# EAGLE board hexapod_mk2_main_v2.0 (EAGLE 9.6.2)
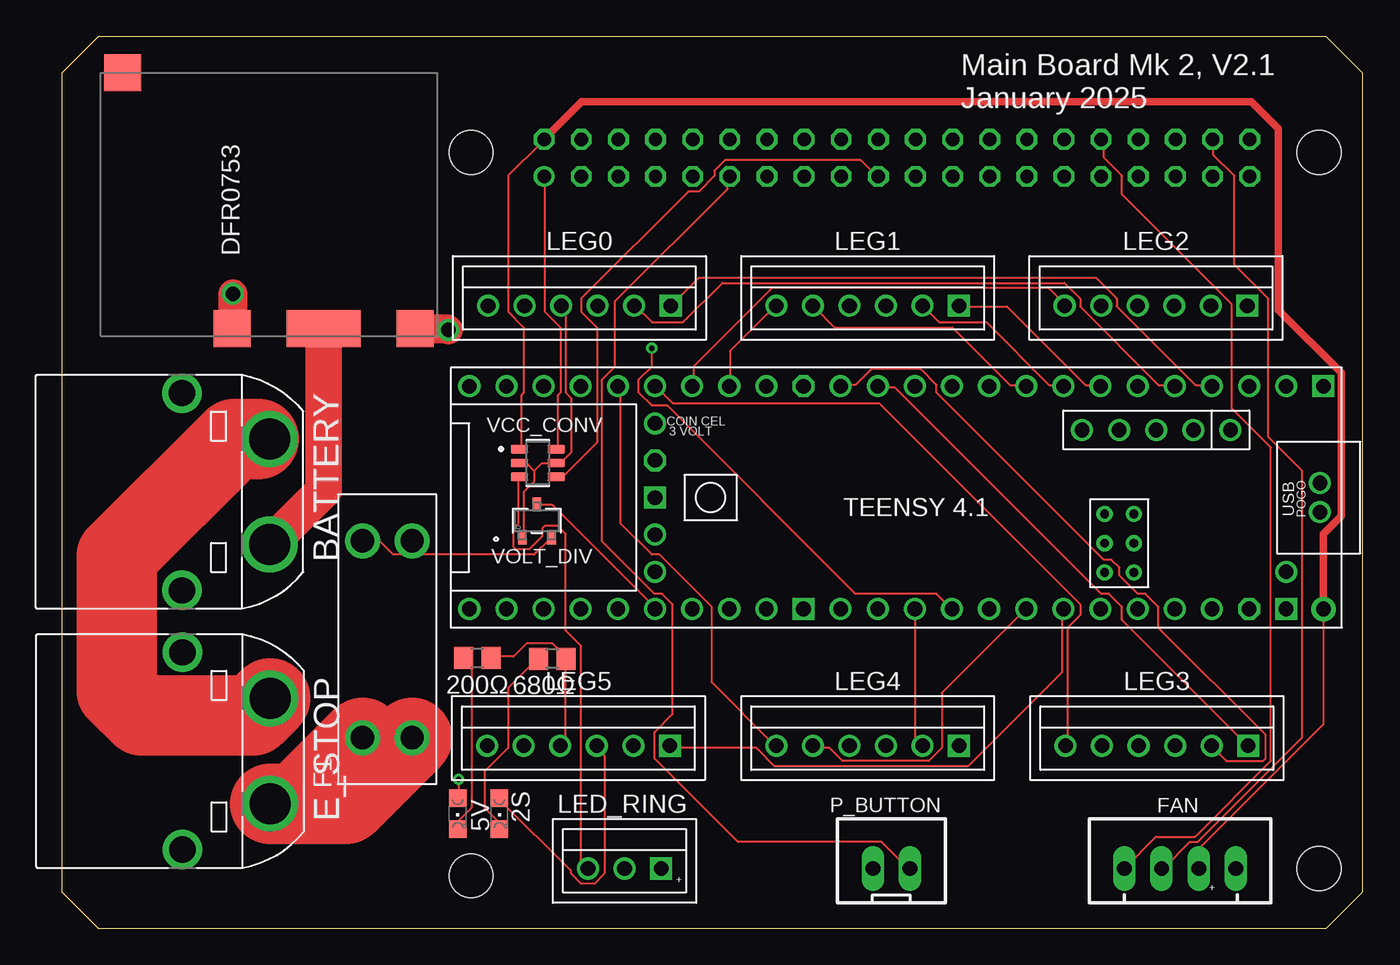
[diagram p0: board, top side]
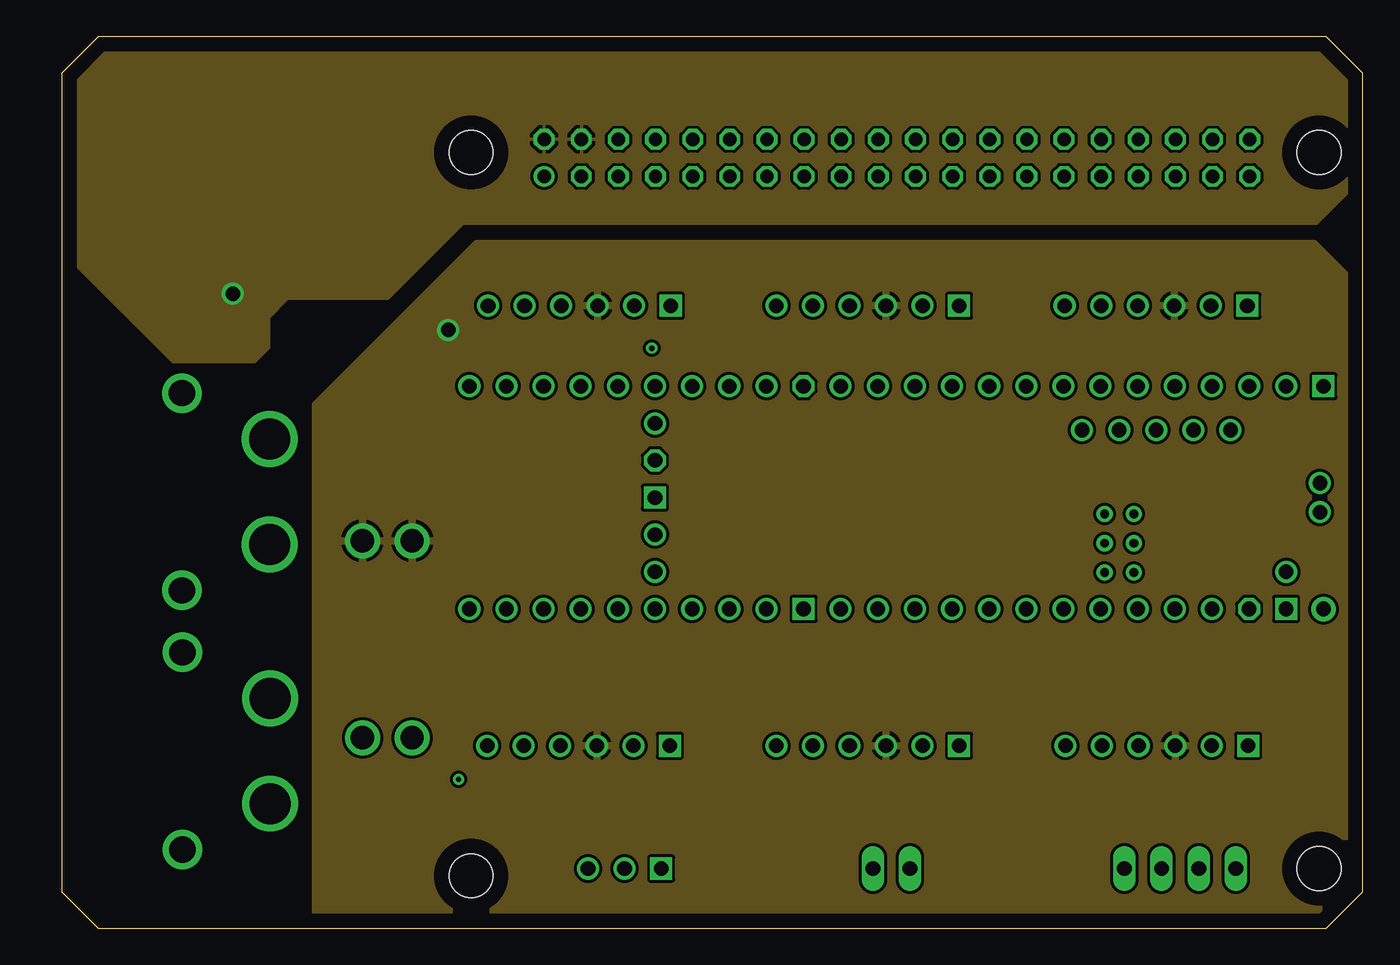
[diagram p1: board, inner layer Route2]
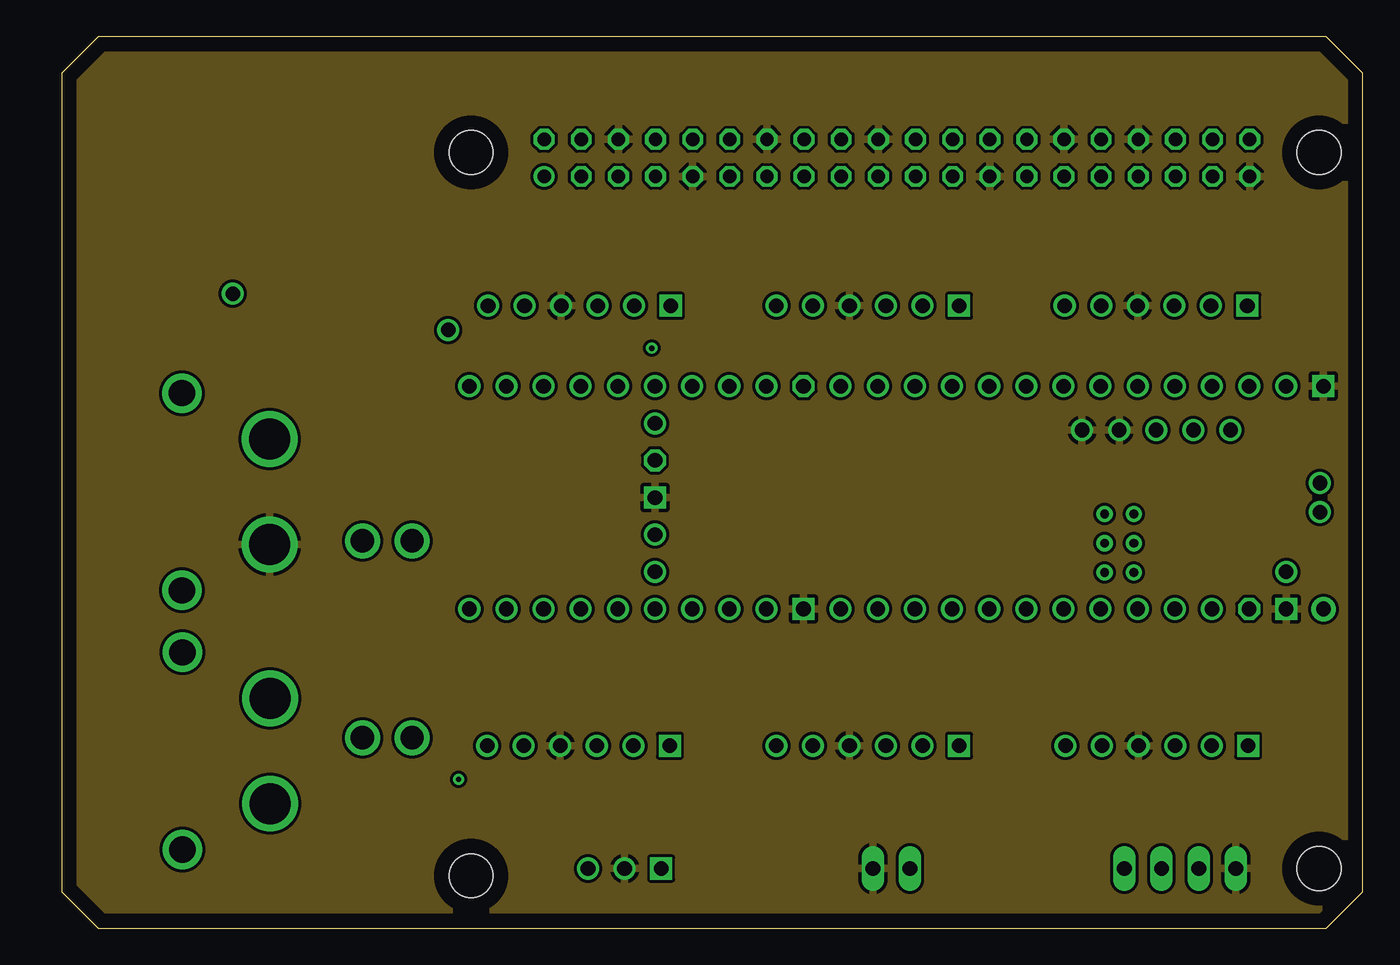
[diagram p2: board, inner layer Route15]
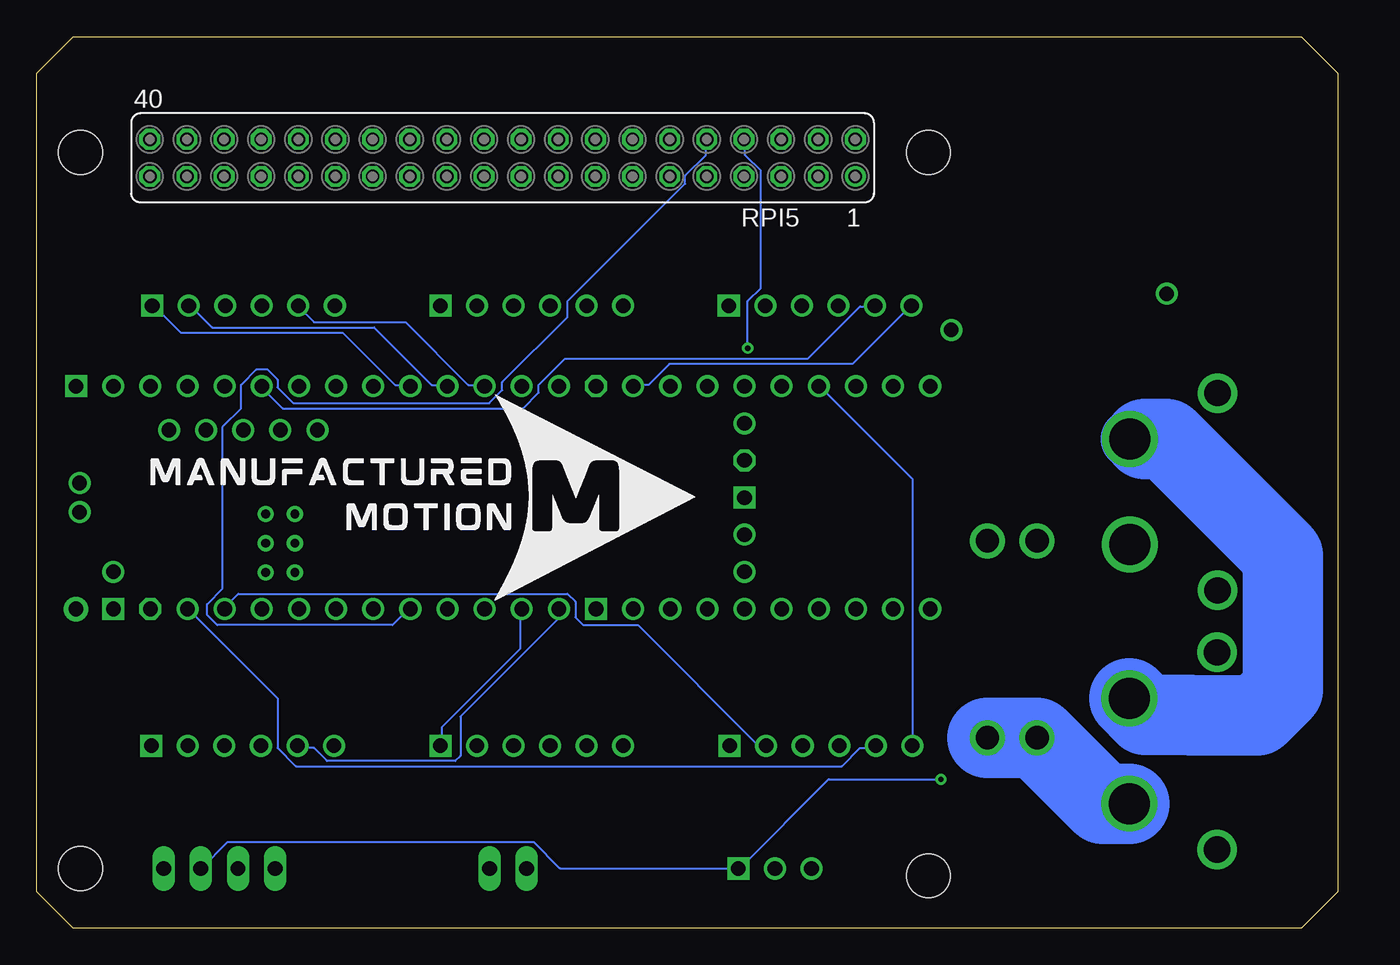
[diagram p3: board, bottom side, seen from below]

Size 89 x 61 mm. Coordinates in mm from the lower left corner, seen from the top.
Outline: 0,58.5 0,2.5 2.5,0 86.5,0 89,2.5 89,58.5 86.5,61 2.5,61 0,58.5
Copper layers (1+2*15+16): Top 0.035mm / dielectric 1.5mm / Route2 0.035mm / dielectric 0.15mm / Route15 0.035mm / dielectric 0.2mm / Bottom 0.035mm
Design rules "default *": minimum track width 6mil, minimum drill 0.35mm, track to track 6mil, track to pad 6mil, pad to pad 6mil, via to via 6mil, smd to smd 6mil, copper to edge 40mil, drill to drill 6mil, minimum pad ring 10mil, minimum via ring 8mil, stop-mask expansion 4mil, vias tented up to drill 0mil, thermal gap 10mil
Net classes: 0 default: clearance 0.205 mm
Holes 3 mm at 27.99,53.08 27.99,3.58 85.99,53.08 85.99,4.08

## Footprints (pad centres in the part's own frame; a part is rotated, then mirrored left to right if it is on the bottom)
CHIPLED_0805 = smd 1.2 x 1.2: A 0,-1.05; C 0,1.05
R0805 = smd 1.3 x 1.5: 1 -0.95,0; 2 0.95,0
XT60PW-M = drill 2.8: + 3.6,0; - -3.6,0 | drill 1.8: P$3 -6.75,6; P$4 6.75,6
DFR0753 = smd 2.54 x 2.54: ANCHOR 9,10; VIN -8.5,-10; VOUT -8.5,2.5 | smd 2.54 x 5.08: GND -8.5,-3.75
FUSE_3557-2 = drill 1.6: 1_1 -6.735,1.7; 1_2 -6.735,-1.7; 2_1 6.735,1.7; 2_2 6.735,-1.7
JST-XH-04-PACKAGE-LONG-PAD = drill 1.016 long: 1 -3.81,0; 2 -1.27,0; 3 1.27,0; 4 3.81,0
B3B-XH = drill 1 square: P$1 2.5,0 | drill 1: P$2 0,0; P$3 -2.5,0
B6B-XH = drill 1 square: P$1 6.25,0 | drill 1: P$2 3.75,0; P$3 1.25,0; P$4 -1.25,0; P$5 -3.75,0; P$6 -6.25,0
JST-XH-02-PACKAGE-LONG-PAD = drill 1.016 long: 1 -1.27,0; 2 1.27,0
MPM_VIS = smd 0.584 x 0.965: 1 -1.003,-1.118; 2 1.003,-1.118; 3 0,1.118
FE20-2 = drill 0.914: 1 -24.13,1.27 | drill 0.914 octagon: 2 -24.13,-1.27; 3 -21.59,1.27; 4 -21.59,-1.27; 5 -19.05,1.27; 6 -19.05,-1.27; 7 -16.51,1.27; 8 -16.51,-1.27; 9 -13.97,1.27; 10 -13.97,-1.27; 11 -11.43,1.27; 12 -11.43,-1.27; 13 -8.89,1.27; 14 -8.89,-1.27; 15 -6.35,1.27; 16 -6.35,-1.27; 17 -3.81,1.27; 18 -3.81,-1.27; 19 -1.27,1.27; 20 -1.27,-1.27; 21 1.27,1.27; 22 1.27,-1.27; 23 3.81,1.27; 24 3.81,-1.27; 25 6.35,1.27; 26 6.35,-1.27; 27 8.89,1.27; 28 8.89,-1.27; 29 11.43,1.27; 30 11.43,-1.27; 31 13.97,1.27; 32 13.97,-1.27; 33 16.51,1.27; 34 16.51,-1.27; 35 19.05,1.27; 36 19.05,-1.27; 37 21.59,1.27; 38 21.59,-1.27; 39 24.13,1.27; 40 24.13,-1.27
SOT95P280X145-6N = smd 1.21 x 0.58: 1 -1.255,0.95; 2 -1.255,0; 3 -1.255,-0.95; 4 1.255,-0.95; 5 1.255,0; 6 1.255,0.95
TEENSY41 = drill 1: 0-RX1/CS1/CRX2 -27.94,-7.62; 1-TX1/MISO1/CTX2 -25.4,-7.62; 2-OUT2 -22.86,-7.62; 3-LRCLK2 -20.32,-7.62; 4-BCLK2 -17.78,-7.62; 5-IN2 -15.24,-7.62; 6-OUT1D -12.7,-7.62; 7-RX2/OUT1A -10.16,-7.62; 8-TX2/IN2 -7.62,-7.62; 9-OUT1C -5.08,-7.62; 10-CS\MQSR -2.54,-7.62; 11-MOSI/CTX1 0,-7.62; 12-MISO/MQSL 2.54,-7.62; 13-SCK/LED 2.54,7.62; 14-A0/TX3/SPDIF_OUT 0,7.62; 15-A1/RX3/SPDIF_IN -2.54,7.62; 16-A2/RX4/SCL1 -5.08,7.62; 17-A3/TX4/SDA1 -7.62,7.62; 18-A4/SDA0 -10.16,7.62; 19-A5/SCL0 -12.7,7.62; 20-A6/TX5/LRCLK1 -15.24,7.62; 21-A7/RX5/BCLK1 -17.78,7.62; 22-A8/CTX1 -20.32,7.62; 23-A9/CRX1/MCLK1 -22.86,7.62; 24-A10/TX6/SCL2 7.62,-7.62; 25-A11/RX6/SDA2 10.16,-7.62; 26-A12/MOSI1 12.7,-7.62; 27-A13/SCK1 15.24,-7.62; 28-RX7 17.78,-7.62; 29-TX7 20.32,-7.62; 30-CRX3 22.86,-7.62; 31-CTX3 25.4,-7.62; 32-OUT1B 27.94,-7.62; 33-MCLK2 27.94,7.62; 34-RX8 25.4,7.62; 35-TX8 22.86,7.62; 36-PWM 20.32,7.62; 37-PWM 17.78,7.62; 38-A14/CS/IN1 15.24,7.62; 39-A15/CS/OUT1A 12.7,7.62; 40-A16/CS1 10.16,7.62; 41-A17/MISO1 7.62,7.62; +5V -24.13,-4.62; D+ -30.25,-1; D- -30.25,1; DM -21.59,-4.62; DP -19.05,-4.62; GND4 -16.51,-4.62; GND5 -13.97,-4.62; ON/OFF 15.24,5.08; PROGRAM 15.24,2.54; VBAT 15.24,-5.08; VUSB -27.94,5.08 | drill 1 octagon: 3V3-1 5.08,-7.62; 3V3-2 15.24,-2.54; 3V3-3 -25.4,7.62 | drill 0.6: G -15.51,3.12; LED -17.51,3.12; R+ -17.51,5.12; R- -15.51,5.12; T+ -15.51,1.12; T- -17.51,1.12 | drill 1 square: GND1 -30.48,-7.62; GND2 15.24,0; GND3 5.08,7.62; GND6 -27.94,7.62 | drill 1 pad 1.676: VIN -30.48,7.62

## Placement (x,y rotation side)
2S  [CHIPLED_0805]  29.93,7.84 180 top
5V  [CHIPLED_0805]  27.08,7.84 180 top
200Ω  [R0805]  28.42,18.48 180 top
680Ω  [R0805]  33.54,18.43 180 top
BATTERY  XT60PW-M  [XT60PW-M]  14.21,29.86 90 top
DFR0753  DFR0753  [DFR0753]  14.16,49.52 90 top
E_STOP  XT60PW-M  [XT60PW-M]  14.25,12.12 90 top
F1  3557-2  [FUSE_3557-2]  22.26,19.76 90 top
FAN  JST-XH-04-PIN-LONG-PAD  [JST-XH-04-PACKAGE-LONG-PAD]  76.49,4.08 0 top
LED_RING  03-JST-B3B-XH-A  [B3B-XH]  38.49,4.08 0 top
LEG0  06-JST-B6B-XH-A  [B6B-XH]  35.4,42.59 0 top
LEG1  06-JST-B6B-XH-A  [B6B-XH]  55.12,42.59 0 top
LEG2  06-JST-B6B-XH-A  [B6B-XH]  74.84,42.59 0 top
LEG3  06-JST-B6B-XH-A  [B6B-XH]  74.9,12.48 0 top
LEG4  06-JST-B6B-XH-A  [B6B-XH]  55.12,12.48 0 top
LEG5  06-JST-B6B-XH-A  [B6B-XH]  35.34,12.48 0 top
P_BUTTON  JST-XH-02-PIN-LONG-PAD  [JST-XH-02-PACKAGE-LONG-PAD]  56.74,4.08 0 top
R1  MPMT10014001AT1MPM_VIS  [MPM_VIS]  32.49,27.86 0 top
RPI5  Raspberry Pi  [FE20-2]  57.12,52.7 180 bottom
U2  SN74LVC1T45DBVR  [SOT95P280X145-6N]  32.55,31.82 0 top
U$1  TEENSY41  [TEENSY41]  55.81,29.46 180 top

## Library data of the parts
2S 5V = led
200Ω 680Ω = rcl; SPICEPREFIX: R
BATTERY E_STOP = amass
DFR0753 = DFR0753
F1 = 3557-2; MANUFACTURER: Keystone; MAXIMUM_PACKAGE_HEIGHT: 7.37mm; PARTREV: D; SNAPEDA_PN: 3557-2; STANDARD: Manufacturer Recommendation
FAN P_BUTTON = Rembrandt Electronics - JST XH Connectors v1-0
LED_RING LEG0 LEG1-LEG5 = bt_con-jst-xh
R1 = MPMT10014001AT1; COPYRIGHT: Copyright (C) 2024 Ultra Librarian. All rights reserved.; MANUFACTURER_PART_NUMBER: MPMT10014001AT1; MFR_NAME: Vishay
RPI5 = con-lsta; OC_FARNELL: unknown; OC_NEWARK: unknown
U2 = SN74LVC1T45DBVR
U$1 = teensy

## Nets
2S_BAT: BATTERY.+ E_STOP.+
2S_ESTOP: E_STOP.- F1.1_1 F1.1_2
2S_PROT: 2S.A DFR0753.VIN F1.2_1 F1.2_2 LEG0.P$3 LEG1.P$3 LEG2.P$3 LEG3.P$3 LEG4.P$3 LEG5.P$3 R1.2
3.3V: RPI5.1 U2.6
5V: 5V.A DFR0753.VOUT FAN.3 LED_RING.P$1 RPI5.2 RPI5.4 U2.1 U$1.VIN
FAN_PWM: FAN.1 RPI5.32
FAN_RPM: FAN.2 RPI5.38
GND: 200Ω.1 680Ω.1 BATTERY.- DFR0753.GND FAN.4 LED_RING.P$2 LEG0.P$4 LEG1.P$4 LEG2.P$4 LEG3.P$4 LEG4.P$4 LEG5.P$4 P_BUTTON.1 R1.1 RPI5.6 RPI5.9 RPI5.14 RPI5.20 RPI5.25 RPI5.30 RPI5.34 RPI5.39 U2.2 U2.5 U$1.GND1 U$1.GND2 U$1.GND3 U$1.GND4 U$1.GND5 U$1.GND6
L0M1: LEG0.P$1 U$1.2-OUT2
L0M2: LEG0.P$2 U$1.3-LRCLK2
L0M3: LEG0.P$5 U$1.4-BCLK2
L0SIG: LEG0.P$6 U$1.24-A10/TX6/SCL2
L1M1: LEG1.P$1 U$1.5-IN2
L1M2: LEG1.P$2 U$1.6-OUT1D
L1M3: LEG1.P$5 U$1.7-RX2/OUT1A
L1SIG: LEG1.P$6 U$1.25-A11/RX6/SDA2
L2M1: LEG2.P$1 U$1.8-TX2/IN2
L2M2: LEG2.P$2 U$1.9-OUT1C
L2M3: LEG2.P$5 U$1.10-CS\MQSR
L2SIG: LEG2.P$6 U$1.26-A12/MOSI1
L3M1: LEG3.P$1 U$1.11-MOSI/CTX1
L3M2: LEG3.P$2 U$1.12-MISO/MQSL
L3M3: LEG3.P$5 U$1.13-SCK/LED
L3SIG: LEG3.P$6 U$1.27-A13/SCK1
L4M1: LEG4.P$1 U$1.14-A0/TX3/SPDIF_OUT
L4M2: LEG4.P$2 U$1.15-A1/RX3/SPDIF_IN
L4M3: LEG4.P$5 U$1.18-A4/SDA0
L4SIG: LEG4.P$6 U$1.28-RX7
L5M1: LEG5.P$1 U$1.19-A5/SCL0
L5M2: LEG5.P$2 U$1.22-A8/CTX1
L5M3: LEG5.P$5 U$1.23-A9/CRX1/MCLK1
L5SIG: LEG5.P$6 U$1.29-TX7
LEDSIG: RPI5.19 U2.4
LEDSIG_CONV: LED_RING.P$3 U2.3
N$1: 5V.C 200Ω.2
N$2: 2S.C 680Ω.2
PWRSIG: P_BUTTON.2 RPI5.11
RPI_RX: RPI5.10 U$1.17-A3/TX4/SDA1
RPI_TX: RPI5.8 U$1.16-A2/RX4/SCL1
V_DIV: R1.3 U$1.38-A14/CS/IN1

## Tracks (layer width: path | path; a pad name or v marks a point on that pad's centre or on a via)
2S_BAT
  Top 0.152: 13.43,33.44 11.79,33.44 11.77,33.46
  Top 4: BATTERY.+ 13.45,33.46 13.43,33.44
  Top 5.5: 13.45,33.46 11.77,33.46 3.77,25.45 3.77,16.24 5.45,14.56 13.1,14.56 E_STOP.+
  Bottom 4: BATTERY.+ 13.18,33.46
  Bottom 5.5: 13.18,33.46 11.72,33.46 3.77,25.5 3.77,16.29 5.49,14.56 10.04,14.56 10.07,14.6 13.14,14.6 E_STOP.+
2S_ESTOP
  Top 5.5: F1.1_1 16.05,8.52 E_STOP.- 19.45,8.52 F1.1_2
  Bottom 5.5: E_STOP.- 16.05,8.52 F1.1_1 F1.1_2
2S_PROT  (via drill 1)
  Top 0.152: R1.2 33.38,26.63 32.31,25.55 22.66,25.55 21.72,26.5 F1.2_1 | 2S.A 29.99,8.76 34.81,3.93 34.81,3.75 35.53,3.04 36.42,3.04 37.13,3.75 37.13,11.79 36.6,12.33 LEG5.P$3
  Top 2: DFR0753.VIN 26.34,41.02 v26.43,40.92
  pour Route2: 28.37,46.84 85.67,46.84 88.82,43.69 88.82,1.05 87.5,-0.26 17.34,-0.26 17.34,35.81
3.3V
  Top 0.152: U2.6 33.92,32.88 33.92,36.45 34.1,36.63 34.1,41.1 33.02,42.17 33.02,51.29 RPI5.1
5V  (via drill 0.35, 1)
  Top 0.152: v27.13,10.19 27.13,8.94 5V.A | U2.1 31.42,32.88 31.42,36.45 31.6,36.63 31.6,41.1 30.52,42.17 30.52,51.47 32.85,53.79 RPI5.2 | FAN.3 77.88,4.11 77.88,5.54 86.28,13.94 86.28,21.62 U$1.VIN
  Top 0.5: RPI5.2 35.56,56.54 81.37,56.54 83.22,54.68 83.22,42.3 87.5,38.02 87.5,28.19 86.29,26.98 U$1.VIN
  Top 2: DFR0753.VOUT 11.69,41.05 v11.69,43.41
  Bottom 0.152: v27.13,10.19 34.81,10.19 40.89,4.11 LED_RING.P$1 41.07,4.11 53.22,4.11 55.01,5.9 75.91,5.9 77.7,4.11 FAN.3
  pour Route2: 0.63,60.94 86.41,60.94 89.26,58.1 89.26,51.58 85.84,48.16 27.45,48.16 27.09,47.81 22.31,43.03 15.46,43.03 14.2,41.77 14.2,39.72 13.17,38.69 7.58,38.69 0.59,45.68 0.59,60.93 0.61,60.93
FAN_PWM
  Top 0.152: RPI5.32 71.27,53.97 71.27,52.72 72.52,51.47 72.52,50.22 80.02,42.71 80.02,35.56 82.7,32.88 82.7,11.44 77.52,6.25 74.84,6.25 72.7,4.11 FAN.1
FAN_RPM
  Top 0.152: RPI5.38 78.77,53.97 78.77,52.9 80.2,51.47 80.2,45.39 82.53,43.07 82.53,33.6 84.85,31.27 84.85,13.04 77.7,5.9 77.16,5.9 75.38,4.11 FAN.2
GND
  Top 0.152: 32.31,31.27 32.31,30.56 31.6,29.84 31.6,26.8 R1.1 | 32.31,31.27 31.77,31.81 31.42,31.81 U2.2 | 32.31,31.27 32.85,31.81 33.74,31.81 U2.5 33.92,31.99 34.28,31.99 34.81,32.52 34.81,36.28 34.45,36.63 34.45,42.35 34.28,42.53 LEG0.P$4 | 200Ω.1 29.45,18.59 30.88,18.59 31.77,19.48 33.56,19.48 34.45,18.59 680Ω.1 34.45,18.41 34.45,12.87 34.1,12.51 LEG5.P$4
  Top 2.5: BATTERY.- 17.91,29.95 DFR0753.GND
  pour Route15: 84.45,65.05 92.5,57.01 92.5,1.13 88.35,-3.02 87.97,-3.39 -14.21,-3.39 -6.65,65.06 -6.65,65.04 -6.64,65.05
L0M1
  Top 0.152: U$1.2-OUT2 78.59,37.17 77.52,37.17 72.16,42.53 72.16,43.07 70.73,44.5 43.57,44.5 41.78,42.71 LEG0.P$1
L0M2
  Top 0.152: U$1.3-LRCLK2 76.09,37.17 75.02,37.17 69.66,42.53 69.66,43.07 68.59,44.14 45.18,44.14 42.5,41.46 40.35,41.46 39.28,42.53 LEG0.P$2
L0M3
  Bottom 0.152: LEG0.P$5 31.77,42.53 32.67,42.53 36.24,38.96 52.86,38.96 54.65,37.17 54.65,36.63 55.72,35.56 72.16,35.56 73.59,36.99 U$1.4-BCLK2
L0SIG
  Bottom 0.152: U$1.24-A10/TX6/SCL2 48.04,37.17 47.14,37.17 45.71,38.6 33.2,38.6 29.27,42.53 LEG0.P$6
L1M1
  Top 0.152: U$1.5-IN2 70.91,37.17 70.02,37.17 64.66,42.53 61.44,42.53 LEG1.P$1
L1M2
  Top 0.152: U$1.6-OUT1D 68.41,37.17 67.51,37.17 63.22,41.46 60.01,41.46 58.94,42.53 LEG1.P$2
L1M3
  Top 0.152: U$1.7-RX2/OUT1A 65.91,37.17 64.83,37.17 60.9,41.1 52.86,41.1 51.43,42.53 LEG1.P$5
L1SIG
  Top 0.152: U$1.25-A11/RX6/SDA2 45.71,37.17 45.71,39.49 48.75,42.53 LEG1.P$6
L2M1
  Bottom 0.152: U$1.8-TX2/IN2 63.58,37.17 64.48,37.17 68.05,40.74 79.13,40.74 80.92,42.53 LEG2.P$1
L2M2
  Bottom 0.152: U$1.9-OUT1C 60.9,37.17 61.98,37.17 65.91,41.1 76.98,41.1 78.42,42.53 LEG2.P$2
L2M3
  Bottom 0.152: U$1.10-CS\MQSR 58.4,37.17 59.47,37.17 63.76,41.46 70.02,41.46 71.09,42.53 LEG2.P$5
L2SIG
  Top 0.152: U$1.26-A12/MOSI1 43.21,37.17 43.21,38.42 48.57,43.78 67.51,43.78 68.59,42.71 LEG2.P$6
L3M1
  Top 0.152: U$1.11-MOSI/CTX1 55.9,36.99 56.97,36.99 71.09,22.87 71.62,22.87 72.52,21.98 72.52,21.09 81.1,12.51 LEG3.P$1
L3M2
  Top 0.152: U$1.12-MISO/MQSL 53.4,37.17 54.29,37.17 55.36,38.24 58.76,38.24 59.83,37.17 59.83,36.63 71.27,25.2 71.8,25.2 72.34,24.66 72.34,24.12 73.59,22.87 74.13,22.87 75.02,21.98 75.02,20.55 82.35,13.22 82.35,11.62 82.17,11.44 79.67,11.44 78.77,12.33 LEG3.P$2
L3M3
  Bottom 0.152: LEG3.P$5 71.09,12.33 70.02,12.33 69.12,11.44 60.37,11.44 60.01,11.79 60.01,14.47 53.4,21.09 53.4,21.8 U$1.13-SCK/LED
L3SIG
  Top 0.152: LEG3.P$6 68.77,12.51 68.77,20.55 69.66,21.44 69.66,22.16 55.9,35.92 41.78,35.92 40.71,36.99 U$1.27-A13/SCK1
L4M1
  Bottom 0.152: U$1.14-A0/TX3/SPDIF_OUT 55.9,21.8 55.9,19.12 61.26,13.76 61.26,12.51 LEG4.P$1
L4M2
  Top 0.152: U$1.15-A1/RX3/SPDIF_IN 58.4,21.8 58.4,12.87 58.76,12.51 LEG4.P$2
L4M3
  Top 0.152: LEG4.P$5 51.43,12.33 52.5,12.33 53.4,11.44 59.29,11.44 60.19,12.33 60.19,16.08 65.91,21.8 U$1.18-A4/SDA0
L4SIG
  Top 0.152: U$1.28-RX7 38.21,36.99 38.21,27.7 40.35,25.55 40.89,25.55 44.46,21.98 44.46,16.8 48.75,12.51 LEG4.P$6
L5M1
  Top 0.152: LEG5.P$1 41.6,12.33 47.5,12.33 48.75,11.08 61.98,11.08 68.41,17.51 68.41,21.8 U$1.19-A5/SCL0
L5M2
  Bottom 0.152: LEG5.P$2 39.1,12.51 39.64,12.51 47.86,20.73 51.61,20.73 52.15,21.27 52.15,22.34 52.68,22.87 75.2,22.87 76.09,21.98 U$1.22-A8/CTX1
L5M3
  Bottom 0.152: LEG5.P$5 31.6,12.33 32.67,12.33 33.92,11.08 71.27,11.08 72.52,12.33 72.52,15.73 78.59,21.8 U$1.23-A9/CRX1/MCLK1
L5SIG
  Bottom 0.152: LEG5.P$6 29.09,12.51 29.09,30.74 35.35,36.99 U$1.29-TX7
LEDSIG
  Top 0.152: U2.4 33.92,30.91 34.28,30.91 36.6,33.24 36.6,41.1 35.53,42.17 35.53,43.07 42.85,50.39 43.57,50.39 44.64,51.47 44.64,51.82 45.35,52.54 54.65,52.54 55.72,51.47 RPI5.19
LEDSIG_CONV
  Top 0.152: U2.3 31.24,30.74 31.24,27.7 30.88,27.34 30.88,26.09 31.06,25.91 31.95,25.91 32.85,26.8 32.85,27.34 33.02,27.52 33.92,27.52 34.45,26.98 34.45,20.37 35.53,19.3 35.53,4.47 35.88,4.11 LED_RING.P$3
N$1
  Top 0.152: 5V.C 27.13,6.79 27.13,7.33 28.02,8.22 28.02,17.87 27.48,18.41 200Ω.2
N$2
  Top 0.152: 2S.C 29.81,6.79 29.81,7.33 28.91,8.22 28.91,10.72 30.52,12.33 30.52,16.44 32.49,18.41 680Ω.2
PWRSIG
  Top 0.152: RPI5.11 45.53,51.29 45.53,50.57 37.85,42.89 37.85,38.42 36.96,37.53 36.96,26.45 40.53,22.87 41.07,22.87 41.78,22.16 41.78,14.65 40.53,13.4 40.53,11.62 46.25,5.9 56.08,5.9 57.86,4.11 P_BUTTON.2
RPI_RX
  Bottom 0.152: RPI5.10 43.21,53.97 43.21,52.9 44.64,51.47 44.64,50.93 52.68,42.89 52.68,41.82 57.15,37.35 57.15,36.81 58.04,35.92 71.45,35.92 72.52,36.99 72.52,37.53 73.23,38.24 73.95,38.24 75.02,37.17 75.02,35.56 76.27,34.31 76.27,23.23 77.34,22.16 77.34,21.44 76.63,20.73 64.66,20.73 63.58,21.8 U$1.17-A3/TX4/SDA1
RPI_TX  (via drill 0.35)
  Top 0.152: v40.35,39.67 40.35,38.42 39.46,37.53 39.46,36.63 40.35,35.74 41.42,35.74 54.29,22.87 59.83,22.87 60.72,21.98 U$1.16-A2/RX4/SCL1
  Bottom 0.152: v40.35,39.67 40.35,42.89 39.46,43.78 39.46,51.82 40.53,52.9 40.53,53.97 RPI5.8
V_DIV
  Top 0.152: R1.3 32.67,28.95 33.56,28.95 40.53,21.98 U$1.38-A14/CS/IN1

## Text on the board
tPlace: Main Board Mk 2, V2.1 / January 2025 | ⏚ | ⏚ | ⏚ | VCC_CONV | VOLT_DIV | ⏚ | ⏚ | ⏚ | ⏚ | + | + | ⏚